# Altium PCB Mega RBG Sheild.PcbDoc
Units mil, origin at the board's own origin, x right, y up, seen from the top; angles counter-clockwise.
Board outline 4015 x 2110 mil, 2 copper layers (Top Layer, Bottom Layer); 6 components, 16 nets, 107 pads, 70 vias.
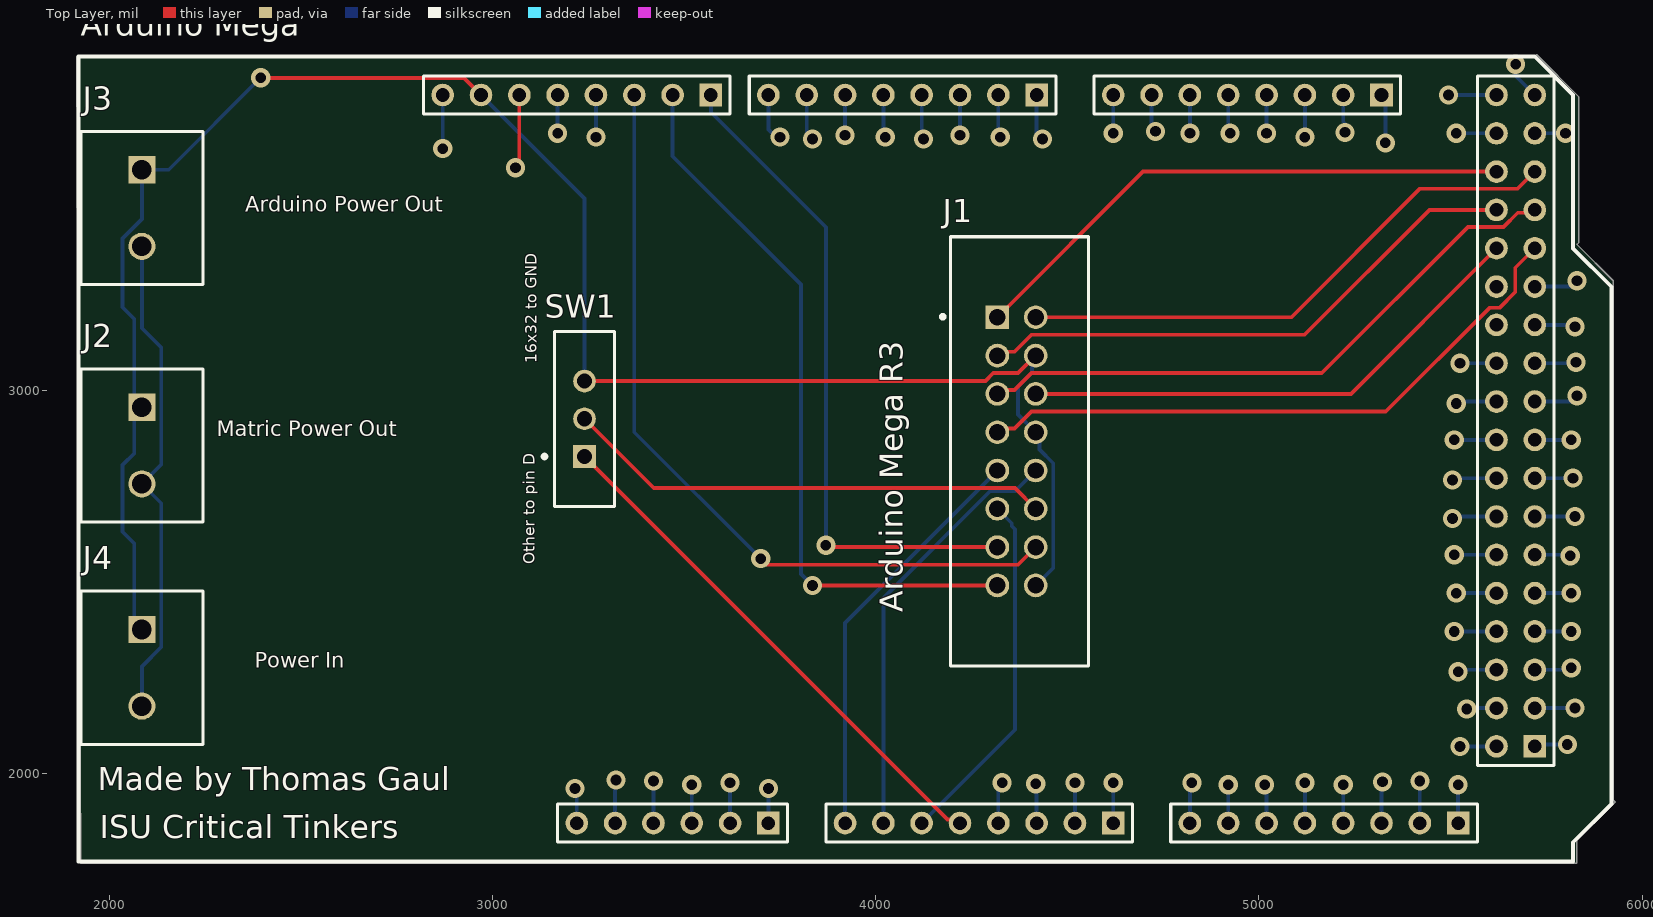
[diagram p0: Top Layer view]
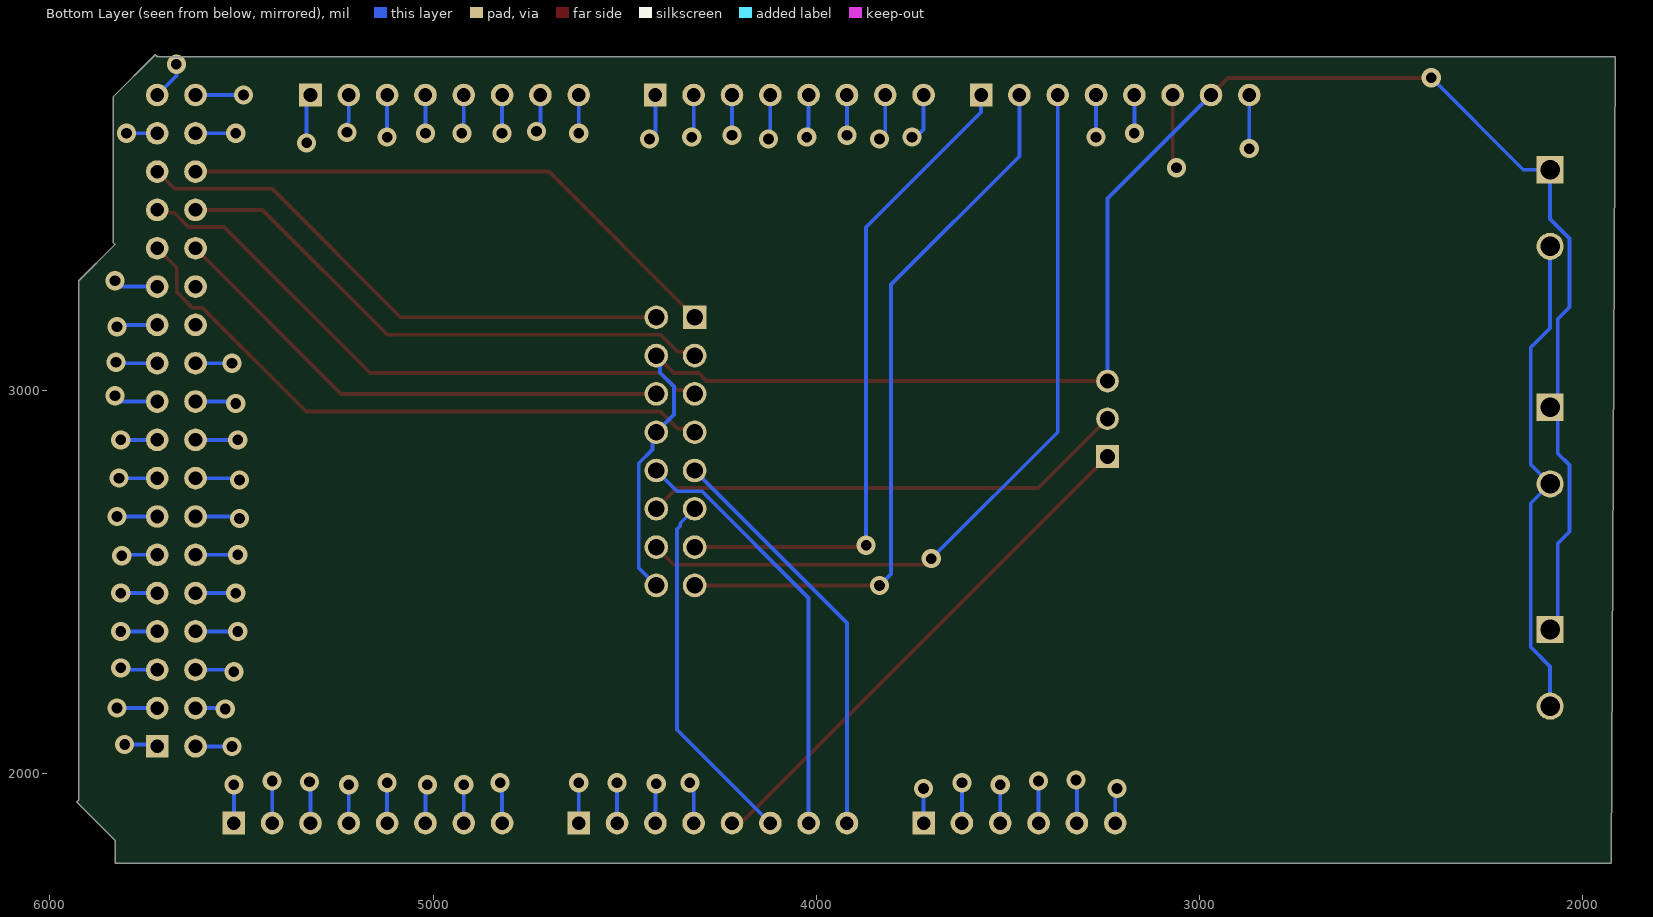
[diagram p1: Bottom Layer view, seen from below]
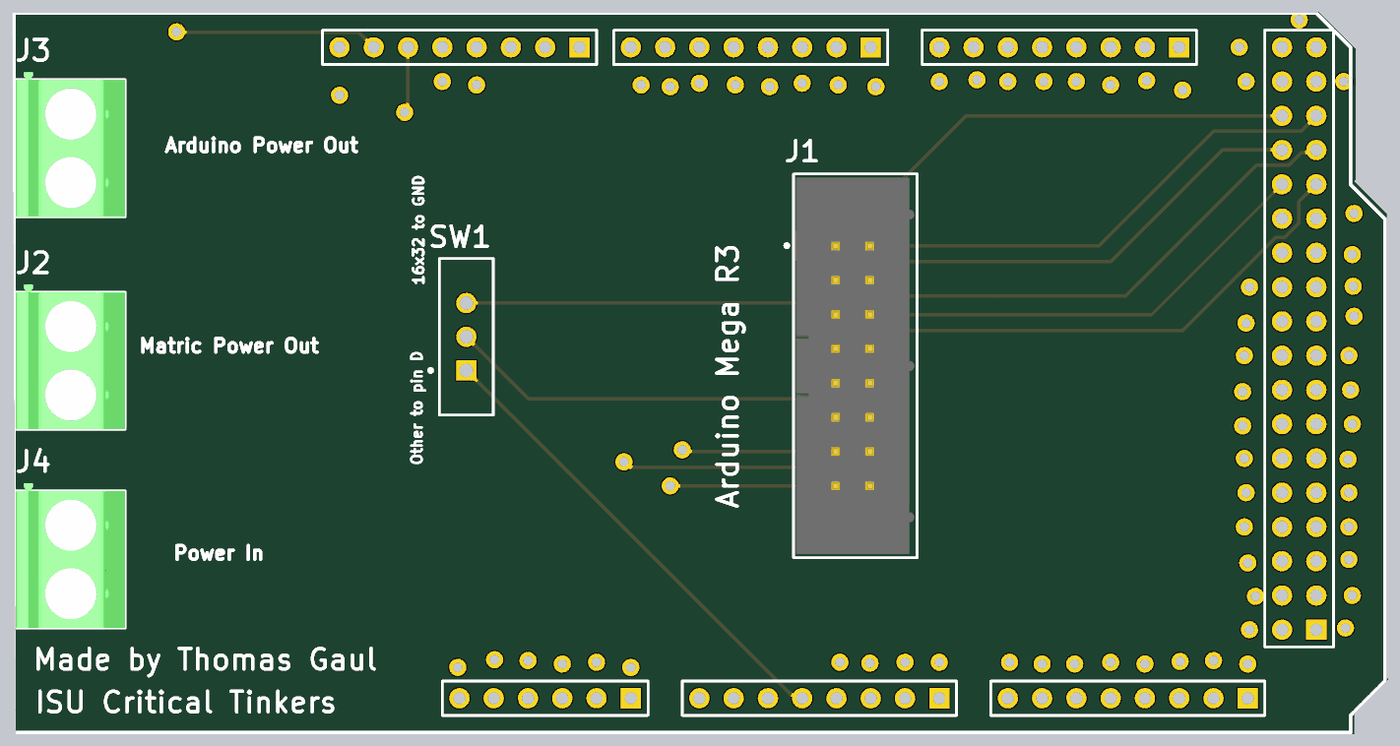
[diagram p2: 3D render of the assembled board from above, using the file's embedded part models]

## Layer stack, top to bottom
Top Solder: solder mask 0.4, Solder Resist, Dk 3.5
Top Layer: signal copper 1.4
Dielectric 1: dielectric 12.6, FR-4, Dk 4.8
Bottom Layer: signal copper 1.4
Bottom Solder: solder mask 0.4, Solder Resist, Dk 3.5

## Board outline
1925,1765 5830,1765 5830,1825 5930,1925 5925,1930 5925,3285 5830,3380 5835,3385 5835,3765 5725,3875 5720,3870 1915,3870

## Design rules (kind name [scope] priority, off if disabled: settings)
Clearance [All] p1: gap=10 ignorepadtopadclearanceinfootprint=FALSE except(0: Arc-Hole Track-Hole SMDPad-Hole THPad-Hole Via-Hole Fill-Hole Poly-Hole Region-Hole Text-Hole)
PolygonConnect [All] p1: connectstyle=Relief reliefconductorwidth=10 reliefentries=4 polygonreliefangle="90 Angle" airgapwidth=10
RoutingVias [All] p1: holewidth=28 width=50 viastyle="Through Hole" minholewidth=28 minwidth=50 maxholewidth=28 maxwidth=50
SolderMaskExpansion [All] p1: expansion=4 istentingtop=FALSE
Width [All] p1: maxlimit=10 minlimit=10 preferedwidth=10
30 further rules are at their usual default settings.

## Classes and differential pairs
component class "Mega RBG Sheild": J1 J2 J3 J4 SW1

## Components (designator, comment, footprint, x,y, rotation, side; value= is the part's Value field where it differs from the comment)
"Arduino Mega" "ARDUINO MEGA" "ARDUINO MEGA" 4020,2870 r0 top
J1 "Odd pins 2x8 plug" FP-30316-6002HB-MFG 4375,2840 r270 top
J2 "RGB matric power out" PHOE-1729128-2_V 2085,2855 r270 top
J3 "Arduino power out" PHOE-1729128-2_V 2085,3475 r270 top
J4 "Power in" PHOE-1729128-2_V 2085,2275 r270 top
SW1 "16x32/other" ESWI-EG1218_V 3240,2925 r90 top

## Footprints (in the part's own frame and the unit in brackets; to place one, negate y for a bottom-side part, rotate by r counter-clockwise, add the part's x,y. Pads: shape width x height; smd on the part's side, far side on the other; paste and mask are expansions set on the pad)
"ARDUINO MEGA" [mm] "Arduino Mega 2560"
  rect 1.5x1.5 hole 0.9: 0(10.16,22.86) 8(-11.43,22.86) 21(33.02,22.86) 59(-7.62,-25.4) 67(15.24,-25.4) 75(38.1,-25.4) 79(43.18,-20.32)
  round 1.5 hole 0.9: 1(7.62,22.86) 2(5.08,22.86) 3(2.54,22.86) 4(0,22.86) 5(-2.54,22.86) 6(-5.08,22.86) 7(-7.62,22.86) 9(-13.97,22.86) 10(-16.51,22.86) 11(-19.05,22.86) 12(-21.59,22.86) 13(-24.13,22.86) 14(15.24,22.86) 15(17.78,22.86) 16(20.32,22.86) 17(22.86,22.86) 18(25.4,22.86) 19(27.94,22.86) 20(30.48,22.86) 22(40.64,20.32) 23(43.18,20.32) 24(40.64,17.78) 25(43.18,17.78) 26(40.64,15.24) 27(43.18,15.24) 28(40.64,12.7) 29(43.18,12.7) 30(40.64,10.16) 31(43.18,10.16) 32(40.64,7.62) 33(43.18,7.62) 34(40.64,5.08) 35(43.18,5.08) 36(40.64,2.54) 37(43.18,2.54) 38(40.64,0) 39(43.18,0) 40(40.64,-2.54) 41(43.18,-2.54) 42(40.64,-5.08) 43(43.18,-5.08) 44(40.64,-7.62) 45(43.18,-7.62) 46(40.64,-10.16) 47(43.18,-10.16) 48(40.64,-12.7) 49(43.18,-12.7) 50(40.64,-15.24) 51(43.18,-15.24) 52(40.64,-17.78) 53(43.18,-17.78) 54(-20.32,-25.4) 55(-17.78,-25.4) 56(-15.24,-25.4) 57(-12.7,-25.4) 58(-10.16,-25.4) 60(-2.54,-25.4) 61(0,-25.4) 62(2.54,-25.4) 63(5.08,-25.4) 64(7.62,-25.4) 65(10.16,-25.4) 66(12.7,-25.4) 68(20.32,-25.4) 69(22.86,-25.4) 70(25.4,-25.4) 71(27.94,-25.4) 72(30.48,-25.4) 73(33.02,-25.4) 74(35.56,-25.4) 76(-26.67,22.86) 77(-29.21,22.86) 78(40.64,-20.32) 80(43.18,22.86) 81(40.64,22.86)
  silkscreen extent -53.34,-27.94 48.26,25.4
ESWI-EG1218_V [mm] "THD, 3-Leads, Body 11.6x4mm, Pitch 2.5mm"
  rect 1.5x1.5 hole 1: 1(-2.5,0)
  round 1.5 hole 1: 2(0,0) 3(2.5,0)
  silkscreen extent -5.8,-2 5.8,2.77, body extent -5.8,-2 5.8,2, height 7.4
FP-30316-6002HB-MFG [mil]
  rect 61.65x61.65 hole 43 paste-39370.1 mask+0: 1(-350,-57.5)
  round 61.65 hole 43 paste-39370.1 mask+0: 2(-350,42.5) 3(-250,-57.5) 4(-250,42.5) 5(-150,-57.5) 6(-150,42.5) 7(-50,-57.5) 8(-50,42.5) 9(50,-57.5) 10(50,42.5) 11(150,-57.5) 12(150,42.5) 13(250,-57.5) 14(250,42.5) 15(350,-57.5) 16(350,42.5)
  silkscreen extent -560,-205 560,180, body extent -564,-184 564,184, height 10
PHOE-1729128-2_V [mm] "Receptacle, 2-Leads, Body 8.1x10.16mm, Pitch 5.08mm"
  rect 1.8x1.8 hole 1.3: 1(-2.54,0)
  round 1.8 hole 1.3: 2(2.54,0)
  silkscreen extent -5.08,-4.05 5.08,4.05, body extent -5.65,-4.05 5.08,4.05, height 10.01

## Part data
J1: library part CMP-05379-000007-1, "CONN HEADER VERT 16POS 2.54MM", Current Rating=1A, Manufacturer=3M, Manufacturer Part Number=30316-6002HB, Temperature="-55°C to +105°C", Temperature Range High=+105°C, Temperature Range Low=-55°C, Automotive=No, Category=Conn, ComponentLink2Description=Datasheet, ComponentLink2URL=https://multimedia.3m.com/mws/media/22504O/3mtm-100-in-loprof-hdr-100x-100strt-ra-4-wall-ts0818.pdf, Conn Gender=Male, Conn Orientation=Straight, Contact Material=Gold,Nickel, Device Class L1=Connectors, Device Class L2="Headers and Wire Housings", Device Class L3=unset, Digikey Description="CONN HEADER VERT 16POS 2.54MM", Height=0.375inch, Lead Free=Yes, Mouser Description="Conn Shrouded Header (4 Sides) HDR 16 POS 2.54mm Solder ST Thru-Hole Box", Number Of Contacts=16, Number of Rows=2, Octopart=https://octopart.com/30316-6002hb-3m-653367, Package=30316-6002HB, Pitch=2.54mm, RoHS=TRUE, Standoff Height=0.01inch
J2 J3 J4: library part CMP-2000-05815-1, "PCB Terminal Block, 13.5 A, 400 V, 2-Pin THD, RoHS, Bulk", Current Rating=13500mA, Manufacturer="Phoenix Contact", Package Description="2-Pin Through Hole Device, Body 8.1 x 10.16 mm, Pitch 5.08 mm", Package Reference=1729128-2, Package Version=03/2015, PartNumber=1729128, Voltage Rating=400V, Datasheet URL=https://datasheet.ciiva.com/16046/1729128-16046181.pdf, Datasheet Version=12/2013, Manufacturer URL=http://www.phoenixcontact.com/, Mounting Technology=ThroughHole, No. of Positions=2, No. of Rows=1, Orientation=Horizontal, Package URL=https://www.phoenixcontact.com/online/portal/pi/pxc/product_detail_page/!ut/p/b1/3VdJjqNKFDxLH8AFycySyWY2ozFsEPOMMQaDOX1XedGL_1Vdm5YXJleknhSKeBkvI6EA8ncAo3AYoDhBQGco6KN7VURTdemj9us_IEKEZo_YHiPAEWEFmDGOHMORkqKYCORBZxgL7ZoaZYcbFFUZ3fqxSY6GOuxydWUuHqz1ynmMFygu583Bob0Ewr6Sd_l-5m-kAueHiB0jpRwZwe58wwtkpxtMYd_LmGcDRU02dRNEyWt6Y2ti5pSyJ_reIkzIulrqApdnbT11V5jnCKbYNCvhEM1MCpPByat_X379-iThf08CI5GfOPqfBeS3BRoBOdD55AKVv0iLwCMq-2BrzXWSGRH7pUGD9uwXQjiph3xL0DKQwdGa0JImiIOmBNOestqgwTHSSs2oOep-78apyXQBvNi8ZLaFjvjWvcaUEBu0MC6Wbe-d6mB0FAebo2lUWinqYaZs5DAYzV0RP9yitUjnGJ0iI9xhZkT42OCQNUJJhkgWINNQLP2JFP6OpMg3JCVg70jqHT0lvKOnhHf0lPuOnnLf0VPuWx6_dxwUIvwk5WMkT0kLL1mh61l2yZVSzG3pYV_bqo-mj6uMKwKwdnnW8Jh5RTOJzMOA5c-eJDaZQw4mTMPH02PvS_ZAqNVjVTo2WyYLkwH_KU1mmmG5kjRhDqPXLwwVHvVOjCM60-fpXvTDfMGW1PVFVS1r4e4yVDk4ZdNbkUHvqPqQSeian4UD39fNKmachqdJ1NJbyk8rXT9mXTvPk3oE5meulKGgiruPJek-4I9hTT6G8ZLOyRSm2RRVbThERQad5OS28hdt4YW4vG0stgYYzsWsK4_7y6DZMjJSCqri1kyiZR5vD7pwIrNR7QwPHTcLTI5qT7eRlpHrdGiupYlqQDJ7zy_CND8fWWBoLRXxk1RVcXiBQwbTD4Xi7KL-FuO94t9xaqweXzH, Packing=Bulk, Pitch=5.08mm, RoHS=TRUE
SW1: library part CMP-1696-00002-1, "Slide Switch, 500 V, -20 to 70 degC, 3-Pin THD, RoHS", Case\Package=SOT-23-5, Dropout Voltage="300 mV", Max Input Voltage="8 V", Max Operating Temperature="85 degC", Max Ouput Current="150 mA", Max Power Dissipation="250 mW", Min Input Voltage="4.3 V", Min Operating Temperature="-40 degC", Nominal Output Voltage="3.3 V", Package Quantity=3000, ComponentLink1Description="Manufacturer URL", ComponentLink1URL=http://www.e-switch.ch/en/, ComponentLink2Description=Datasheet, ComponentLink2URL=https://www.e-switch.com/system/asset/product_line/data_sheet/119/EG.pdf, DatasheetVersion=Oct-15, Height="1.3 mm", Length="3 mm", Mount="Surface Mount", Output Current="150 mA", Output Voltage="3.3 V", Outputs=1, PackageDescription="3-Pin Through Hole Device, Body 11.6 x 4 mm, Pitch 2.5 mm", PackageReference=EG1218, Packaging="Tape and Reel", Pins=5, Power Rating="250 mW", Radiation Hardening=No, REACH SVHC="No SVHC", RoHSCompliant=true, Width="1.8 mm"

## Via types
v1: diameter 50, hole 28, Top Layer to Bottom Layer, 70 vias

## Nets (pads, with @x,y where several pads share a name; then routed paths per layer and width w, separated by ;. In a path a pad name is that pad's centre, name@x,y a point inside that pad or via, vN(x,y) a via of type N, cw(c..) or ccw(c..) an arc to the next point about the centre after c; other vN are vias at no path point)
GND: "Arduino Mega.76" J1.4 J1.8 J1.16 J2.1 J3.1 J4.1 SW1.3 | length 5021.3
  Top Layer w10: v1@2399.53,3814.53 2925.47,3814.53 2970,3770 ; SW1.3 4286.12,3023.43 4306.86,3044.17 4371.67,3044.17 J1.4
  Bottom Layer w10: J4.1 2065,2395 2065,2599.56 2034.57,2629.99 2034.57,2804.12 2065,2834.55 2065,2935 J2.1 2065,2975 2065,3185.45 2034.57,3215.88 2034.57,3395.89 2085,3446.32 J3.1 2155,3575 v1(2395,3815) ; 2970,3770 3240,3500 SW1.3 ; J1.16 4463.33,2535.83 4463.33,2808.98 4427.38,2844.93 4427.38,2880.12 J1.8 4371.67,2935.83 4371.67,3008.98 4407.62,3044.93 4407.62,3080.12 J1.4
"NetArduino Mega_8": "Arduino Mega.8" J1.13 | length 1746.8
  Top Layer w10: v1@3870,2590 J1.13
  Bottom Layer w10: 3570,3770 3570,3725 3870,3425 v1(3870,2595)
"NetArduino Mega_9": "Arduino Mega.9" J1.15 | length 1913.7
  Top Layer w10: v1(3835,2490) J1.15
  Bottom Layer w10: 3470,3770 3470,3610 3805,3275 3805,2520 v1(3835,2490)
"NetArduino Mega_10": "Arduino Mega.10" J1.14 | length 2082.7
  Top Layer w10: v1@3705,2555 3715.83,2544.17 4371.67,2544.17 J1.14
  Bottom Layer w10: 3370,3770 3370,2890 v1(3700,2560)
"NetArduino Mega_24": "Arduino Mega.24" J1.1 | length 1459.9
  Top Layer w10: J1.1 4697.5,3570 5620,3570
"NetArduino Mega_25": "Arduino Mega.25" J1.2 | length 1459.9
  Top Layer w10: J1.2 5085,3190 5420.47,3525.47 5675.47,3525.47 5720,3570
"NetArduino Mega_26": "Arduino Mega.26" J1.3 | length 1459.9
  Top Layer w10: J1.3 4327.38,3099.88 4362.57,3099.88 4406.86,3144.17 5119.17,3144.17 5445,3470 5620,3470
"NetArduino Mega_27": "Arduino Mega.27" J1.5 | length 1601.3
  Top Layer w10: J1.5 4327.38,2999.88 4362.57,2999.88 4406.86,3044.17 5164.17,3044.17 5545.47,3425.47 5638.44,3425.47 5675.47,3462.5 5712.5,3462.5 5720,3470
"NetArduino Mega_28": "Arduino Mega.28" J1.6 | length 1359.9
  Top Layer w10: J1.6 5240,2990 5620,3370
"NetArduino Mega_29": "Arduino Mega.29" J1.7 | length 1638.2
  Top Layer w10: J1.7 4327.38,2899.88 4362.57,2899.88 4406.86,2944.17 5331.2,2944.17 5601.56,3214.53 5627.5,3214.53 5669.06,3256.09 5669.06,3319.06 5720,3370
"NetArduino Mega_60": "Arduino Mega.60" J1.9 | length 1084.6
  Bottom Layer w10: 3920,1870 3920,2392.5 J1.9
"NetArduino Mega_61": "Arduino Mega.61" J1.10 | length 1122.6
  Bottom Layer w10: 4020,1870 4020,2457.31 4298.52,2735.83 4363.33,2735.83 J1.10
"NetArduino Mega_62": "Arduino Mega.62" J1.11 | length 939.8
  Bottom Layer w10: 4120,1870 4363.33,2113.33 4363.33,2636.67 4355,2645 4355,2652.5 J1.11
"NetArduino Mega_63": "Arduino Mega.63" SW1.1 | length 1376.2
  Top Layer w10: SW1.1 4187.19,1879.39 4210.61,1879.39 4220,1870
NetJ1_12: J1.12 SW1.2 | length 1274.8
  Top Layer w10: SW1.2 3420.83,2744.17 4363.33,2744.17 J1.12
NetJ2_2: J2.2 J3.2 J4.2 | length 1283.6
  Bottom Layer w10: J4.2 2085,2278.84 2135.43,2329.27 2135.43,2704.57 J2.2 2135.43,2805.43 2135.43,3110.73 2085,3161.16 J3.2
pads on no net: "Arduino Mega.0" "Arduino Mega.1" "Arduino Mega.2" "Arduino Mega.3" "Arduino Mega.4" "Arduino Mega.5" "Arduino Mega.6" "Arduino Mega.7" "Arduino Mega.11" "Arduino Mega.12" "Arduino Mega.13" "Arduino Mega.14" "Arduino Mega.15" "Arduino Mega.16" "Arduino Mega.17" "Arduino Mega.18" "Arduino Mega.19" "Arduino Mega.20" "Arduino Mega.21" "Arduino Mega.22" "Arduino Mega.23" "Arduino Mega.30" "Arduino Mega.31" "Arduino Mega.32" "Arduino Mega.33" "Arduino Mega.34" "Arduino Mega.35" "Arduino Mega.36" "Arduino Mega.37" "Arduino Mega.38" "Arduino Mega.39" "Arduino Mega.40" "Arduino Mega.41" "Arduino Mega.42" "Arduino Mega.43" "Arduino Mega.44" "Arduino Mega.45" "Arduino Mega.46" "Arduino Mega.47" "Arduino Mega.48" "Arduino Mega.49" "Arduino Mega.50" "Arduino Mega.51" "Arduino Mega.52" "Arduino Mega.53" "Arduino Mega.54" "Arduino Mega.55" "Arduino Mega.56" "Arduino Mega.57" "Arduino Mega.58" "Arduino Mega.59" "Arduino Mega.64" "Arduino Mega.65" "Arduino Mega.66" "Arduino Mega.67" "Arduino Mega.68" "Arduino Mega.69" "Arduino Mega.70" "Arduino Mega.71" "Arduino Mega.72" "Arduino Mega.73" "Arduino Mega.74" "Arduino Mega.75" "Arduino Mega.77" "Arduino Mega.78" "Arduino Mega.79" "Arduino Mega.80" "Arduino Mega.81"
copper on no net: | length 7123.8
  Top Layer w10: v1@3060,3575 3070,3585 3070,3770
  Bottom Layer w10: 2870,3770 v1(2870,3630) v1@2875,3625 ; v1(3170,3670) 3170,3770 ; v1(3215,1960) 3220,1955 3220,1870 ; v1(3270,3660) 3270,3770 ; 3320,1870 3320,1980 v1@3325,1985 ; 3420,1870 v1(3420,1980) ; 3520,1870 v1(3520,1970) ; 3620,1870 v1(3620,1975) ; 3720,1870 v1(3720,1960) ; 3720,3770 3720,3680 v1@3745,3655 ; 3820,3770 3820,3665 v1@3825,3660 ; v1(3920,3665) 3920,3770 ; 4020,3770 4020,3665 v1(4025,3660) ; v1@4120,3660 4120,3770 ; v1(4220,3665) 4220,3770 ; 4320,1870 4320,1975 v1@4325,1980 ; v1@4320,3670 4320,3770 ; v1@4415,1975 4420,1970 4420,1870 ; 4420,3770 4420,3670 v1@4430,3660 ; 4520,1870 v1(4520,1975) ; 4620,1870 v1(4620,1975) ; v1(4620,3670) 4620,3770 ; v1@4720,3675 4720,3770 ; 4820,1870 v1@4820,1980 ; v1(4820,3670) 4820,3770 ; 4920,1870 v1(4920,1970) ; 4920,3770 4920,3675 v1(4925,3670) ; v1@5010,1975 5020,1965 5020,1870 ; 5020,3770 v1(5020,3670) v1@5025,3665 ; 5120,1870 v1(5120,1975) ; v1(5120,3660) 5120,3770 ; v1@5215,1975 v1(5220,1970) 5220,1870 ; 5220,3770 5220,3700 5230.86,3689.14 5230.86,3680.86 5225,3675 v1@5225,3670 ; 5320,1870 5320,1975 v1@5325,1980 ; 5320,3770 5330,3760 v1(5330,3645) ; 5420,1870 v1(5420,1980) ; v1@5490,2775 5495,2770 5620,2770 ; v1(5495,3770) 5620,3770 ; v1@5505,2675 5510,2670 5620,2670 ; v1@5505,2865 v1(5510,2870) 5620,2870 ; v1@5510,2275 5515,2270 5620,2270 ; v1(5510,2370) 5620,2370 ; v1(5510,2570) 5620,2570 ; v1@5510,2960 5520,2970 5620,2970 ; v1@5510,3675 v1(5515,3670) 5620,3670 ; 5520,1870 v1(5520,1970) ; v1@5520,3075 v1(5525,3070) 5620,3070 ; v1(5525,2070) 5620,2070 ; v1@5525,2470 5620,2470 ; v1@5540,2165 5545,2170 5620,2170 ; v1(5670,3850) 5670,3820 5720,3770 ; 5720,2070 5725,2075 v1(5805,2075) ; 5720,2170 v1(5825,2170) ; 5720,2270 5810,2270 v1(5815,2275) ; 5720,2370 v1(5815,2370) ; 5720,2470 v1(5815,2470) v1@5820,2465 ; 5720,2570 5810,2570 v1@5815,2565 ; 5720,2670 v1(5825,2670) ; 5720,2770 v1(5820,2770) ; 5720,2870 v1(5815,2870) v1@5820,2865 ; 5720,2970 5820,2970 v1@5825,2975 ; 5720,3070 5825,3070 v1@5830,3075 ; 5720,3170 5820,3170 v1(5825,3165) ; 5720,3270 5815,3270 v1(5830,3285) ; 5720,3670 v1(5800,3670)
  other v1: 5015,1970 4417.5,1972.5 4330,1975 4825,1975 5322.5,1977.5 3322.5,1982.5 5542.5,2167.5 5520,2265 5515,2470 5812.5,2567.5 5505,2665 5505,2765 5515,2965 5830,2985 5827.5,3072.5 3060,3580 3835,3655 4125,3655 4435,3655 3750,3660 4325,3660 5225,3672.5 4730,3675

## Silkscreen, mask and mechanical layers (free items; w line width, h text height)
Top Overlay:
  text "Arduino Power Out" at 2355,3465 h40
  text "16x32 to GND" at 3115,3070 h30 r90
  text "Matric Power Out" at 2280,2880 h40
  text "Other to pin D" at 3110,2545 h30 r90
  text "Power In" at 2380,2275 h40
  text "Made by Thomas Gaul" at 1970,1954.99 h60
  text "ISU Critical Tinkers" at 1975,1830 h60
Bottom Overlay:
  drawing of 46 lines, arcs and shapes, not listed

## Text inside footprints (layer, text, board x,y; h text height)
"Arduino Mega": Top Overlay "Arduino Mega R3" at 4070,2420 h60 r90